# Altium PCB PCB1.PcbDoc
Units mm, origin at the board's own origin, x right, y up, seen from the top; angles counter-clockwise.
Board outline 26.42 x 76.71 mm, 2 copper layers (Top Layer, Bottom Layer), stack 1.671 mm thick; 31 components, 65 nets, 188 pads, 84 vias.
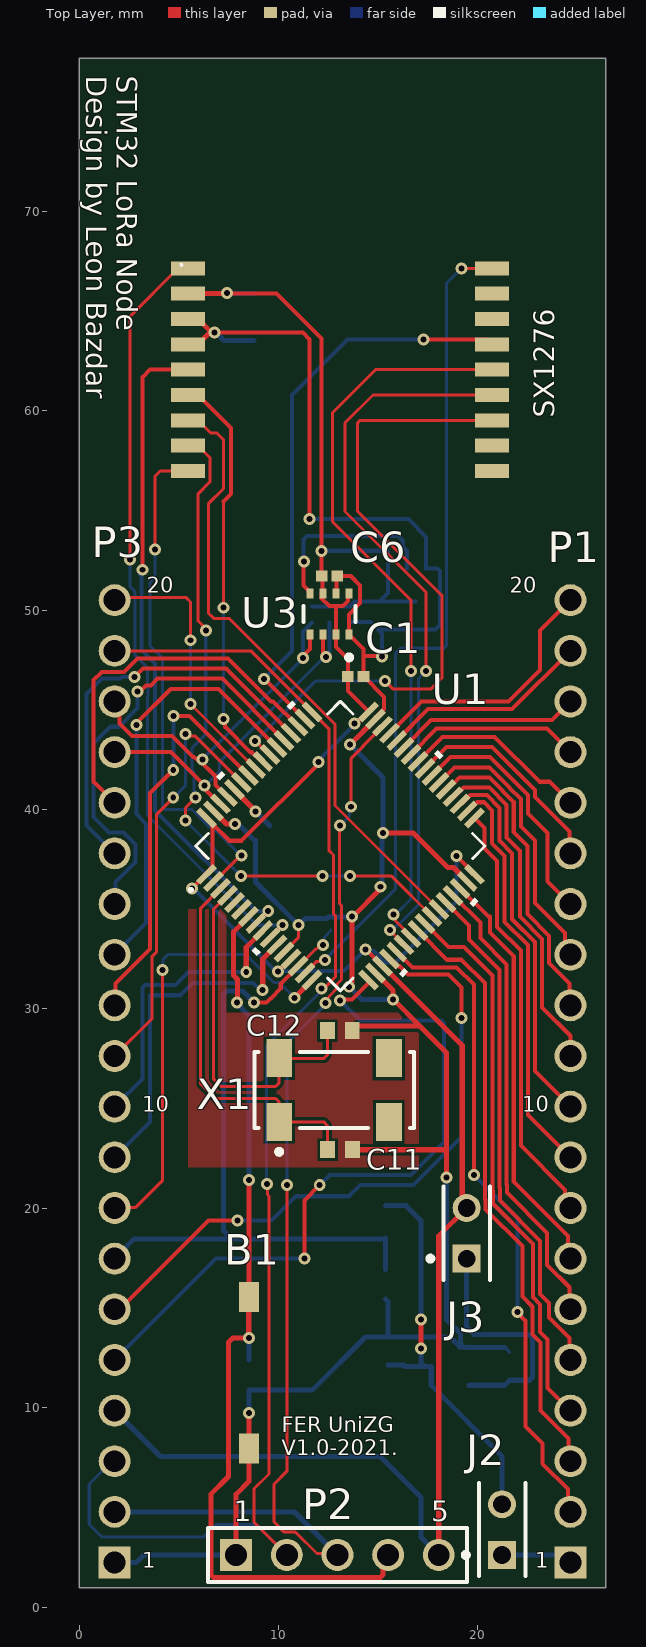
[diagram p0: Top Layer view]
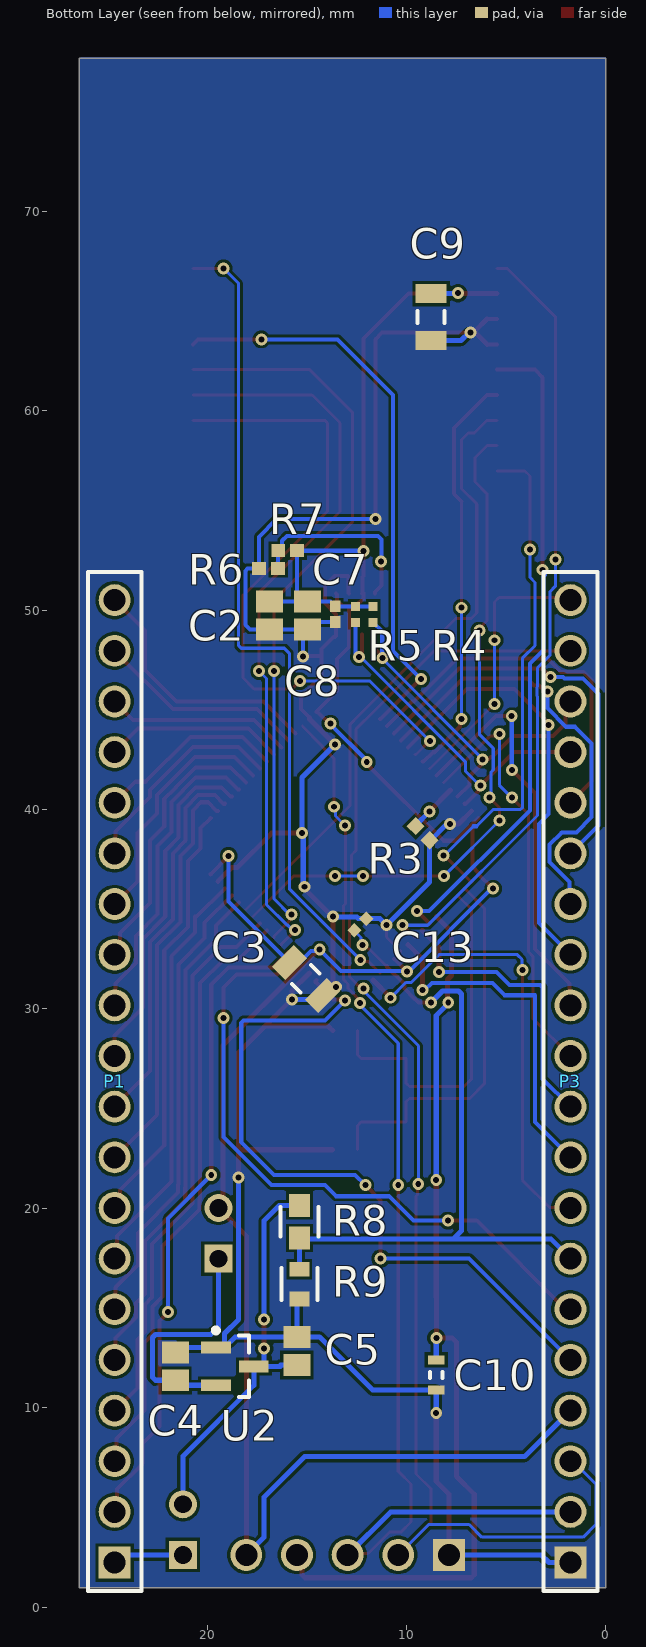
[diagram p1: Bottom Layer view, seen from below]

## Layer stack, top to bottom
Top Solder: solder mask 0.0102, Solder Resist, Dk 3.5
Top Layer: signal copper 0.0356
Dielectric 1: dielectric 1.6, FR-4, Dk 4.8
Bottom Layer: signal copper 0.0356
Bottom Solder: solder mask 0.0102, Solder Resist, Dk 3.5

## Board outline
0,77.673 26.416,77.673 26.416,0.965 0,0.965

## Design rules (kind name [scope] priority, off if disabled: settings)
Clearance [All] p1: gap=0.152 ignorepadtopadclearanceinfootprint=TRUE
PolygonConnect [All] p1: connectstyle=Direct reliefconductorwidth=0.254 reliefentries=4 polygonreliefangle="90 Angle" airgapwidth=0.254
RoutingPriority RoutingPriority_1 [All] p1: routingpriority=0
RoutingPriority [All] p2: routingpriority=0
RoutingVias [All] p1: holewidth=0.3 width=0.6 viastyle="Through Hole" minholewidth=0.3 minwidth=0.6 maxholewidth=0.3 maxwidth=0.6
SolderMaskExpansion [All] p1: expansion=0.102 istentingtop=FALSE
UnRoutedNet [All] p1: checkbadconnections=TRUE
Width [All] p1: maxlimit=1.016 minlimit=0.152 preferedwidth=0.305
28 further rules are at their usual default settings.

## Classes and differential pairs
net class PC[0..15]: PC0 PC1 PC2 PC3 PC4 PC5 PC6 PC7 PC8 PC9 PC10 PC11 PC12 PC13 PC14 PC15
net class PB[0..15]: PB0 PB1 PB2 PB3 PB4 PB5 PB6 PB7 PB8 PB9 PB10 PB11 PB12 PB13 PB14 PB15
net class PA[0..15]: PA0 PA1 PA2 PA3 PA4 PA5 PA6 PA7 PA8 PA9 PA10 PA11 PA12 PA13 PA14 PA15

## Components (designator, comment, footprint, x,y, rotation, side; value= is the part's Value field where it differs from the comment)
B1 "PushButton 3x6x2.5 SMD" "PushButton 3x6x2.5 SMD-Footprint-1" 8.509,11.75 r270 top
C1 "100nF" CAPC1005X56X25LL10T15 13.868,46.66 r0 top
C2 "1uF" CAPC2013X145X50LL20T25 16.878,49.733 r270 bottom
C3 "10uF" CAPC2013X145X20ML20 15.044,31.503 r45 bottom
C4 "1uF" CAPC2013X145X50LL20T25 21.59,12.076 r90 bottom
C5 "1uF" CAPC2013X145X50LL20T25 15.494,12.841 r90 bottom
C6 "100nF" CAPC1005X56X25LL10T15 12.552,51.703 r0 top
C7 "100nF" CAPC1005X56X25LL10T15 13.577,49.789 r270 bottom
C8 "1uF" CAPC2013X145X50LL20T25 14.974,49.733 r270 bottom
C9 "10uF" CAPC2013X145X20ML20 8.763,64.687 r90 bottom
C10 "100nF" CAPC1608X90X20LL10 8.509,11.645 r270 bottom
C11 "4.3pF" CAPC1608X90X35LL10T15 13.081,22.936 r0 top
C12 "4.3pF" CAPC1608X90X35LL10T15 13.071,28.905 r180 top
C13 "1nF" CAPC1005X55X25LL05T05 12.319,34.239 r315 bottom
J2 "BAT current" TECO-5-146280-2_V 21.209,3.886 r90 top
J3 "DEV CUR" TECO-5-146280-2_V 19.431,18.745 r90 top
P1 "20p header" 61302011121 24.638,26.365 r90 bottom
P2 "SWD header 2.54" 61300511121 12.954,2.616 r0 top
P3 "20p header" 61302011121 1.778,26.365 r90 bottom
R3 "100K" RESC1005X40X25ML05T05 9.195,38.811 r45 bottom
R4 "4.7k" RESC1005X40X25LL05T05 11.672,49.779 r90 bottom
R5 "4.7k" RESC1005X40X25LL05T05 12.561,49.779 r90 bottom
R6 "0R" RESC1005X40X25ML05T10 16.912,52.084 r180 bottom
R7 "0R" RESC1005X40X25ML05T10 15.957,52.973 r0 bottom
R8 "1.2MΩ" FP-CRCW0603-e3-IPC_A 15.367,19.327 r270 bottom
R9 "3.24MΩ" FP-CRCW0603-e3-MFG 15.367,16.193 r270 bottom
SX1276 "RC-SM1276-868" RC-SM1276-868 13.303,66.164 r0 top (schematic designator LoRa)
U1 "STM32L072RZT6" LQFP64-10x10mm 13.098,38.163 r45 top
U2 "MCP1700T-3302E/TT" SOT-23-TT3_N 18.608,12.075 r180 bottom
U3 "BME280" FP-BME280-MFG 12.561,49.798 r270 top
X1 "ABS25-32.768KHZ-6-T" ABRA-ABS25-4_V 12.783,25.933 r0 top

## Footprints (in the part's own frame and the unit in brackets; to place one, negate y for a bottom-side part, rotate by r counter-clockwise, add the part's x,y. Pads: shape width x height; smd on the part's side, far side on the other; paste and mask are expansions set on the pad)
61300511121 [mm] "Pin Header, pitch 2.54 mm, THT, Vertical, single row, 5p"
  rect 1.6x1.6 hole 1.1: 1(-5.08,0)
  round 1.6 hole 1.1: 2(-2.54,0) 3(0,0) 4(2.54,0) 5(5.08,0)
  silkscreen extent -6.5,-1.34 6.5,1.34, body extent -6.35,-1.27 6.35,1.27, height 8.57
61302011121 [mm] "Pin Header, pitch 2.54 mm, THT, Vertical, single row, 20p"
  rect 1.6x1.6 hole 1.1: 1(-24.13,0)
  round 1.6 hole 1.1: 2(-21.59,0) 3(-19.05,0) 4(-16.51,0) 5(-13.97,0) 6(-11.43,0) 7(-8.89,0) 8(-6.35,0) 9(-3.81,0) 10(-1.27,0) 11(1.27,0) 12(3.81,0) 13(6.35,0) 14(8.89,0) 15(11.43,0) 16(13.97,0) 17(16.51,0) 18(19.05,0) 19(21.59,0) 20(24.13,0)
  silkscreen extent -25.55,-1.35 25.55,1.35, body extent -25.4,-1.27 25.4,1.27, height 8.57
ABRA-ABS25-4_V [mm] "SMD, 4-Leads, Body 8x3.8mm, Pitch 5.5mm, Height 2.5mm"
  rect 1.3x1.9 smd: 1(-2.75,-1.6) 2(2.75,-1.6) 3(2.75,1.6) 4(-2.75,1.6)
  silkscreen extent -4,-3.22 4,1.9, body extent -4,-2 4,2, height 2.66
CAPC1005X55X25LL05T05 [mm] "Chip Capacitor, 2-Leads, Body 1.00x0.50mm, IPC High Density"
  rect 0.52x0.52 smd: 1(-0.41,0) 2(0.41,0)
  body extent -0.53,-0.28 0.53,0.28, height 0.55
CAPC1005X56X25LL10T15 [mm] "Chip Capacitor, 2-Leads, Body 1.00x0.50mm, IPC High Density"
  rect 0.58x0.54 smd: 1(-0.39,0) 2(0.39,0)
  body extent -0.55,-0.3 0.55,0.3, height 0.56
CAPC1608X90X20LL10 [mm] "Chip Capacitor, 2-Leads, Body 1.70x0.90mm, IPC High Density"
  rect 0.45x0.85 smd: 1(-0.75,0) 2(0.75,0)
  silkscreen extent -0.15,-0.33 0.15,0.33, body extent -0.85,-0.45 0.85,0.45, height 0.9
CAPC1608X90X35LL10T15 [mm] "Chip Capacitor, 2-Leads, Body 1.60x0.80mm, IPC High Density"
  rect 0.75x0.85 smd: 1(-0.625,0) 2(0.625,0)
  body extent -0.85,-0.45 0.85,0.45, height 0.9
CAPC2013X145X20ML20 [mm] "Chip Capacitor, 2-Leads, Body 2.20x1.45mm, IPC Low Density"
  rect 0.95x1.55 smd: 1(-1.175,0) 2(1.175,0)
  silkscreen extent -0.3,-0.67 0.3,0.67, body extent -1.1,-0.73 1.1,0.73, height 1.45
CAPC2013X145X50LL20T25 [mm] "Chip Capacitor, 2-Leads, Body 2.00x1.25mm, IPC High Density"
  rect 1.1x1.35 smd: 1(-0.7,0) 2(0.7,0)
  body extent -1.1,-0.72 1.1,0.72, height 1.45
FP-BME280-MFG [mm]
  rect 0.5x0.35 smd paste+0 mask+0: 1(1.025,0.975) 2(1.025,0.325) 3(1.025,-0.325) 4(1.025,-0.975) 5(-1.025,-0.975) 6(-1.025,-0.325) 7(-1.025,0.325) 8(-1.025,0.975)
  silkscreen extent -0.4,-1.3 2.3,1.3, body extent -1.8,-1.8 1.8,1.8, height 0.25
FP-CRCW0603-e3-IPC_A [mm]
  rect 1.135x1.062 smd paste+0 mask+0: 1(-0.815,0) 2(0.815,0)
  silkscreen extent -0.75,-0.95 0.75,0.95, body extent -0.77,-0.43 0.77,0.43, height 0.5
FP-CRCW0603-e3-MFG [mm]
  rect 0.75x1 smd paste+0 mask+0: 1(-0.75,0) 2(0.75,0)
  silkscreen extent -0.8,-0.9 0.8,0.9, body extent -0.77,-0.43 0.77,0.43, height 0.5
LQFP64-10x10mm [mil]
  rect 47x12 smd paste+0 mask+0: 1(-226.38,147.64) 2(-226.38,127.95) 3(-226.38,108.27) 4(-226.38,88.58) 5(-226.38,68.9) 6(-226.38,49.21) 7(-226.38,29.53) 8(-226.38,9.84) 9(-226.38,-9.84) 10(-226.38,-29.53) 11(-226.38,-49.21) 12(-226.38,-68.9) 13(-226.38,-88.58) 14(-226.38,-108.27) 15(-226.38,-127.95) 16(-226.38,-147.64) 33(226.38,-147.64) 34(226.38,-127.95) 35(226.38,-108.27) 36(226.38,-88.58) 37(226.38,-68.9) 38(226.38,-49.21) 39(226.38,-29.53) 40(226.38,-9.84) 41(226.38,9.84) 42(226.38,29.53) 43(226.38,49.21) 44(226.38,68.9) 45(226.38,88.58) 46(226.38,108.27) 47(226.38,127.95) 48(226.38,147.64)
  rect 12x47 smd paste+0 mask+0: 17(-147.64,-226.38) 18(-127.95,-226.38) 19(-108.27,-226.38) 20(-88.58,-226.38) 21(-68.9,-226.38) 22(-49.21,-226.38) 23(-29.53,-226.38) 24(-9.84,-226.38) 25(9.84,-226.38) 26(29.53,-226.38) 27(49.21,-226.38) 28(68.9,-226.38) 29(88.58,-226.38) 30(108.27,-226.38) 31(127.95,-226.38) 32(147.64,-226.38) 49(147.64,226.38) 50(127.95,226.38) 51(108.27,226.38) 52(88.58,226.38) 53(68.9,226.38) 54(49.21,226.38) 55(29.53,226.38) 56(9.84,226.38) 57(-9.84,226.38) 58(-29.53,226.38) 59(-49.21,226.38) 60(-68.9,226.38) 61(-88.58,226.38) 62(-108.27,226.38) 63(-127.95,226.38) 64(-147.64,226.38)
  silkscreen extent -273,-270 270,270, body extent 0,0 10,10, height 10
"PushButton 3x6x2.5 SMD-Footprint-1" [mm]
  rect 1.5x1 smd: 1(-3.8,0) 2(3.8,0)
  body extent -3.8,-1.5 3.9,1.5, height 2.5
RC-SM1276-868 [mm] "Chip Array, Flat, 18-Leads, Pitch 1,27mm,  Body 23,00x16,00mm,  IPC Medium Density"
  rect 1.7x0.7 smd: 1(-7.842,0.968) 2(-7.842,-0.302) 3(-7.842,-1.572) 4(-7.842,-2.842) 5(-7.842,-4.112) 6(-7.842,-5.382) 7(-7.842,-6.652) 8(-7.842,-7.922) 9(-7.842,-9.192) 10(7.398,-9.192) 11(7.398,-7.922) 12(7.398,-6.652) 13(7.398,-5.382) 14(7.398,-4.112) 15(7.398,-2.842) 16(7.398,-1.572) 17(7.398,-0.302) 18(7.398,0.968)
  silkscreen extent -8.23,1.1 -8.13,1.2, body extent -8,-11.5 8,11.5, height 1
RESC1005X40X25LL05T05 [mm] "Chip Resistor, 2-Leads, Body 1.05x0.55mm, IPC High Density"
  rect 0.45x0.45 smd: 1(-0.4,0) 2(0.4,0)
  body extent -0.53,-0.28 0.53,0.28, height 0.4
RESC1005X40X25ML05T05 [mm] "Chip Resistor, 2-Leads, Body 1.05x0.55mm, IPC Low Density"
  rect 0.65x0.65 smd: 1(-0.5,0) 2(0.5,0)
  body extent -0.52,-0.27 0.52,0.28, height 0.4
RESC1005X40X25ML05T10 [mm] "Chip Resistor, 2-Leads, Body 1.00x0.50mm, IPC Low Density"
  rect 0.7x0.65 smd: 1(-0.475,0) 2(0.475,0)
  body extent -0.53,-0.27 0.53,0.28, height 0.4
SOT-23-TT3_N [mm] "SOT23, 3-Leads, Body 2.9x1.3mm, Pitch 0.95mm, Lead Span 2.4mm, IPC Medium Density"
  rect 1.5x0.6 smd: 1(-0.95,0.95) 2(-0.95,-0.95) 3(0.95,0)
  silkscreen extent -1.07,-1.55 0.7,1.92, body extent -0.7,-1.52 0.7,1.53, height 1.12
TECO-5-146280-2_V [mm] "Connector, 2-Leads, Body 4.67x2.34mm, Pitch 2.54mm"
  rect 1.4x1.4 hole 0.89: 1(-1.27,0)
  round 1.4 hole 0.89: 2(1.27,0)
  silkscreen extent -2.34,-1.17 2.34,1.94, body extent -2.34,-1.17 2.34,1.17, height 5.33

## Part data
B1: library part CMP-011-00013-4
C1 C6 C7: library part CMP-2008-02842-1, Manufacturer="AVX Interconnect / Elco", Part Number=0402YD104KAT2A
C2 C4 C5 C8: library part CMP-2007-01016-1, Manufacturer=Kemet, Part Number=C0805C105K4PACTU
C3 C9: library part CMP-2000-05452-1, "Multilayer Ceramic Chip Capacitor, 10 uF, +/- 10%, 10 V, -55 to 125 degC, 0805 (2012 Metric), RoHS, Tape and Reel", Capacitance=10µF, Manufacturer=TDK, Operating Temperature=-55degC~125degC, Package / Case=0805(2012Metric), Package Description="2-Pin Surface Mount Device, Body 2 x 1.25 mm", Package Reference=805, PCN Part Number=MLCCPartNumberChange30/Nov/2012, Ratings=-, Standard Package=1, Temperature Coefficient=X7R, Tolerance=±10%, Voltage - Rated=10V, Applications=GeneralPurpose, Category=Capacitors, Datasheet URL=http://download.siliconexpert.com/pdfs/2015/4/21/15/54/45/779/tdk_/manual/37024850441143360mlcc_commercial_general_en.pdf, Datasheet Version=Mar-15, Family=CeramicCapacitors, Features=-, Height - Seated (Max)=-, Lead Spacing=-, Lead Style=-, Manufacturer URL=http://www.tdk.com/, Mounting Type=SurfaceMount,MLCC, Online Catalog=CSeries,GeneralPurpose, Other Names=445-6857-6, Packaging=Digi-Reel, Product Training Modules=CSeriesGeneralApplicationsSEAT,CCV,andTVCLDesignToolsGuidetoReplacinganElectrolyticCapacitorwithanMLCC, RoHS Information=RoHSCertificate-MLCC, Series=C, Size / Dimension="0.079\"Lx0.049\"W(2.00mmx1.25mm)", Thickness (Max)="0.057\"(1.45mm)"
C10: library part CMP-2000-07546-1, "Chip Capacitor, 0.1 uF, +/- 10%, 50 V, -55 to 125 degC, 0603 (1608 Metric), RoHS, Tape and Reel", Case Code (Imperial)=0603, Case Code (Metric)=1608, Dielectric=X7R, Manufacturer=TDK, Max Operating Temperature=125degC, Min Operating Temperature=-55degC, Package Description="2-Pin Surface Mount Device, Body 1.6 x 0.8 mm", Package Quantity=1, Package Reference=603, Tolerance=10%, Voltage=50V, Capacitance=100nF, Case/Package=0603, Composition=Ceramic, Datasheet URL=https://product.tdk.com/info/en/catalog/datasheets/mlcc_automotive_general_en.pdf, Datasheet Version=12/2014, Depth=0.8mm, Height=0.8mm, Lead Free=LeadFree, Length=1.6mm, Manufacturer URL=http://www.tdk.com/, Mount=SurfaceMount, Mounting Technology=SurfaceMount, Packaging=TapeandReel, Radiation Hardening=No, REACH SVHC=NoSVHC, RoHSCompliant=True, Termination=SMD/SMT, Thickness=0.035inch, Voltage Rating=50V, Voltage Rating (DC)=50V, Weight=7.1E-05oz, Width=0.8mm
C11 C12: library part CMP-2006-02448-1, Manufacturer=Murata, Part Number=GQM1885C2A4R3BB01D
C13: library part CMP-2008-01229-1, Manufacturer=Vitramon, Part Number=VJ0402Y102KXXCW1BC
J2 J3: library part CMP-2000-07492-1, "Male Header, Pitch 2.54 mm, 1 x 2 Position, Height 8.21 mm, Tail Length 3.05 mm, -65 to 105 degC, RoHS, Bulk", Case\/Package=100, Colour=Black, Current Rating=3A, Flammability Rating=UL94V-0, High Temperature Housing=Yes, Manufacturer="TE Connectivity", Max Current Rating=5A, Max Operating Temperature=105degC, Min Operating Temperature=-65degC, Package Description="Male Header, Pitch 2.54 mm, 1 x 2 Position, Height 8.21 mm, Tail Length 3.05 mm", Package Quantity=500, Package Reference=5-146280-2, Approvals=CSA, Board Standoff=No(Without), Connector Type=Header, Contact Gender=Male, Contact Material=CopperAlloy, Contact Mating Length=0.23inch, Contact Plating=Matte, Contact Protection=No(Without), Contact Shape=Square, Datasheet URL=http://www.te.com/commerce/DocumentDelivery/DDEController?Action=showdoc&DocId=Customer+Drawing%7F146280%7FH1%7Fpdf%7FEnglish%7FENG_CD_146280_H1.pdf%7F5-146280-2, Datasheet Version="Rev. H1, 08/2016", Depth=2.34mm, Gasket=No(Without), High Speed Serial Data Connector=No, Housing Colour=Black, Housing Material=Polymer, Keyed=No, Length=4.67mm, Manufacturer URL=http://www.te.com/, Mating Alignment=No(Without), Mating Connector Lock=No(Without), Mating Post Length=0.23inch, Mount=ThroughHole, Mounting Technology=ThroughHole, Number of Contacts=2, Number of Positions=2, Number of Rows=1, Orientation=Straight, Packaging=Carton, Panel Mount Retention=No(Without), PCB Mount Retention=Without, PCB Mounting Orientation=Vertical, PCB Thickness=0.063inch, Pitch=2.54mm, Radiation Hardening=No, RoHSCompliant=true, Row Spacing=2.54mm, Selectively Loaded=No(Without), Stabilizers=No(Without), Termination=ThroughHole, Termination Post Length=0.12inch
P1 P3: library part CMP-1502-01102-1, "THT Vertical Pin Header WR-PHD, Pitch 2.54 mm, Single Row, 20 pins", Contact Resistance=20mOhm, Manufacturer="Wurth Elektronik", Operating Temperature=-40to105degC, Package Reference=61302011121, Rated Current=3A, Withstanding Voltage=500VAC, Working Voltage=250VAC, Datasheet URL=https://katalog.we-online.de/em/datasheet/6130xx11121.pdf, Gender=Male, Manufacturer URL=http://www.we-online.de, Mounting Technology=THT, Orientation=Vertical, Packaging=Bag, Part Number=61302011121, Pin Number=20, Pitch=2.54mm, Publisher=WurthElektronik, Row Number=Single
P2: library part CMP-1502-01068-1, "THT Vertical Pin Header WR-PHD, Pitch 2.54 mm, Single Row, 5 pins", Contact Resistance=20mOhm, Manufacturer="Wurth Elektronik", Operating Temperature=-40to105degC, Package Reference=61300511121, Rated Current=3A, Withstanding Voltage=500VAC, Working Voltage=250VAC, Datasheet URL=https://katalog.we-online.de/em/datasheet/6130xx11121.pdf, Gender=Male, Manufacturer URL=http://www.we-online.de, Mounting Technology=THT, Orientation=Vertical, Packaging=Bag, Part Number=61300511121, Pin Number=5, Pitch=2.54mm, Publisher=WurthElektronik, Row Number=Single
R3: library part CMP-2002-08123-2, "Chip Resistor, 100 KOhm, +/- 1%, 0.63 W, -55 to 155 degC, 0402 (1005 Metric), RoHS, Tape and Reel", Case Code (Imperial)=0402, Case Code (Metric)=1005, Max Operating Temperature="155 degC", Min Operating Temperature="-55 degC", Package Quantity=10000, Power Rating="63 mW", Resistance="100 kohm", Tolerance=1%, Type (Resistor)="Thick Film", Voltage Rating="50 V", Case\Package=0402, ComponentLink1Description="Manufacturer URL", ComponentLink1URL=http://www.vishay.com/, ComponentLink2Description=Datasheet, ComponentLink2URL=http://www.vishay.com/docs/20035/dcrcwe3.pdf, DatasheetVersion=06/2012, Height="0.35 mm", Length="1 mm", Mount="Surface Mount", Mounting Technology="Surface Mount", PackageDescription="2-Pin Surface Mount Device, Body 1 x 0.5 mm", PackageReference=0402, Packaging="Tape and Reel", Pins=2, Radiation Hardening=No, REACH SVHC=Unknown, RoHSCompliant=true, Weight="2.3E-05 oz", Width="0.5 mm"
R4 R5: library part CMP-1665-00031-3, "Chip Resistor, 4.7 KOhm, +/- 1%, 0.1 W, -55 to 155 degC, 0402 (1005 Metric), RoHS, Tape and Reel", Case Code (Imperial)=0402, Case Code (Metric)=1005, Max Operating Temperature="155 degC", Min Operating Temperature="-55 degC", Package Quantity=1, PartNumber=ERJ-2RKF4701X, Power Rating="100 mW", Resistance="4.7 KOhm", Tolerance=1%, Voltage Rating="50 V", Case\/Package=0402, ComponentLink1Description="Manufacturer URL", ComponentLink1URL=http://www.panasonic.com/, ComponentLink2Description=Datasheet, ComponentLink2URL=http://industrial.panasonic.com/cdbs/www-data/pdf/RDA0000/AOA0000C86.pdf, DatasheetVersion=04/2015, Height="0.35 mm", Length="1 mm", Mount="Surface Mount", Mounting Technology="Surface Mount", PackageDescription="2-Pin Surface Mount Device, Body 1 x 0.5 mm", PackageReference=0402, Packaging="Cut Tape", Pins=2, Radiation Hardening=No, REACH SVHC=Yes, RoHSCompliant=true, Width="0.5 mm"
R6 R7: library part CMP-2002-08060-1, Manufacturer="Yageo / Phycomp", Part Number=RC0402JR-130RL
R8: library part CMP-2000-03023-2, "RES Thick Film, 1.2MΩ, 1%, 0.1W, 100ppm/°C, 0603", Case Code (Imperial)=0603, Case Code (Metric)=1608, Max Operating Temperature=155°C, Max Power Dissipation=100mW, Min Operating Temperature=-55°C, Package Quantity=10, Resistance=1.2MR, Temperature Coefficient=100ppm/°C, Tolerance=1%, Voltage Rating=75V, Case/Package=0603, Composition="Thick Film", Contact Plating=Tin, Depth=0.85mm, Features="Automotive AEC-Q200", Height=0.45mm, Lead Free="Lead Free", Length=1.55mm, Military Standard=Not, Number of Pins=2, Number of Terminations=2, Packaging="Tape and Reel", Power Rating=100mW, Radiation Hardening=No, Termination=SMD/SMT, Voltage Rating (DC)=75V, Weight=7.1E-05oz, Width=0.033inch
R9: library part CMP-2000-03317-2, "RES Thick Film, 3.24MΩ, 1%, 0.1W, 100ppm/°C, 0603", Case Code (Imperial)=0603, Case Code (Metric)=1608, Max Operating Temperature=155°C, Max Power Dissipation=100mW, Min Operating Temperature=-55°C, Package Quantity=10, Resistance=3.24MR, Temperature Coefficient=100ppm/°C, Tolerance=1%, Voltage Rating=75V, Case/Package=0603, Composition="Thick Film", Contact Plating=Tin, Depth=0.85mm, Features="Automotive AEC-Q200", Height=0.02inch, Lead Free="Lead Free", Length=1.55mm, Military Standard=Not, Number of Terminations=2, Packaging="Tape and Reel", Power Rating=100mW, Radiation Hardening=No, Voltage Rating (DC)=75V, Weight=7.1E-05oz, Width=0.033inch
SX1276: library part CMP-021-00007-1, "https://www.radiocontrolli.com/it/componente/97/rc-sm1276-868", Max Operating Temperature=85°C, Max Supply Voltage=3.7V, Min Operating Temperature=-40°C, Min Supply Voltage=1.8V, Mounting Technology=SMT, Pins=18
U1: "No Description Available", Built_By=EMA_UL_Team, Copyright="Copyright (C) 2018 Accelerated Designs. All rights reserved", Manufacturer_Part_Number=STM32L072RZT6, RefDes=RefDes, SourceLibrary=Updates_to_database_2020-10-19, Type=DEV, Vendor=STMicroelectronics
U2: library part CMP-0136-00791-1, "Low Quiescent Current LDO, 3-Pin SOT-23, Extended Temperature, Tape and Reel", Code_IPC=SOT23-3, DatasheetVersion="revB, Feb-2007", PackageDescription="3-Lead Plastic Small Outline Transistor (TT) [SOT-23]", PackageReference=SOT-23-TT3, PackageVersion="revBB, Aug-2009"
U3: library part CMP-191074-000001-1, "SENSOR PRESSURE HUMIDITY TEMP", Case/Package=LGA, Max Operating Temperature=85°C, Min Operating Temperature=-40°C, Accuracy=3%, Lead Free="Lead Free", Mount="Surface Mount", Number of Pins=8, Output Type=SPI, Packaging="Cut Tape", Response Time=1s, Sensor Type=Temperature
X1: library part CMP-2000-05036-1, "Low Frequency Crystal, 32.768 KHz, 6 pF, +/- 20 ppm, -40 to 85 degC, 4-Pin SMD, RoHS, Tape and Reel", Case Height=2.5mm, Case Length=8mm, Case Width=3.8mm, Frequency=32.768kHz, Load Capacitance=6pF, Manufacturer=Abracon, Operating Temperature Range=-40Cto+85C, Package / Case=8mmx3.8mm, Package Description="4-Pin Surface Mount Device, Body 8 x 3.8 mm, Pitch 5.5 mm", Package Reference=ABS25, Tolerance=20PPM, Brand=ABRACON, Datasheet URL=https://datasheet.ciiva.com/854/abs25-854528.pdf, Datasheet Version=Jun-17, Dimensions=3.8mmWx8mmLx2.5mmH, ESR=50kOhms, Factory Pack Quantity=3000, Manufacturer URL=http://www.abracon.com/, Mounting Style=SMD/SMT, Packaging=Reel, Product Category=Crystals, RoHS=Details, Series=ABS25, Termination Style=SMD/SMT, Type=LowFrequencyCrystal

## Via types
v1: diameter 0.6, hole 0.3, Top Layer to Bottom Layer, 84 vias

## Nets (pads, with @x,y where several pads share a name; then routed paths per layer and width w, separated by ;. In a path a pad name is that pad's centre, name@x,y a point inside that pad or via, vN(x,y) a via of type N, cw(c..) or ccw(c..) an arc to the next point about the centre after c; other vN are vias at no path point)
3V3_REG: C4.1 J3.1 U2.2 | length 12.3
  Bottom Layer w0.254: J3.1 19.431,14.046 19.812,13.665 22.584,13.665 22.733,13.516 22.733,11.525 22.584,11.376 C4.1 21.339,11.125 U2.2
BOOT0: R3.2 U1.60 | length 2.6
  Top Layer w0.152: U1.60@7.795,40.969 U1.60
  Top Layer w0.254: U1.60@7.795,40.969 8.839,39.925 v1(8.839,39.903)
  Bottom Layer w0.254: v1(8.839,39.903) 9.548,39.194 R3.2
NetC5_1: C5.1 J2.2 R8.1 U2.3 | length 20
  Top Layer w0.254: v1(17.145,12.962) v1(17.145,14.427)
  Bottom Layer w0.254: R8.1 16.383,20.142 17.145,19.38 v1(17.145,14.427) ; C5.1 16.324,12.141 ; 16.324,12.075 U2.3@17.318,12.075 ; v1(17.145,12.962) 17.145,12.248 U2.3@17.318,12.075 ; J2.2 21.209,7.569 17.658,11.12 U2.3 U2.3@17.318,12.075
NetLoRa_10: SX1276.10
NetLoRa_11: SX1276.11
NetLoRa_16: SX1276.16
NetLoRa_17: SX1276.17
NetU1_5: U1.5
NetU1_6: U1.6
NetX1_2: X1.2
NetX1_3: X1.3
NRST: B1.1 C10.1 P2.4 U1.7 | length 45.9
  Top Layer w0.254: v1(7.907,30.312) 7.944,30.349 7.944,31.472 7.747,31.67 7.747,33.872 U1.7 ; v1(8.509,21.412) B1.1 8.507,15.548 v1(8.507,13.5) 7.709,13.5 7.493,13.284 7.493,6.553 6.604,5.664 6.604,1.622 6.753,1.473 15.091,1.473 15.24,1.622 15.24,2.362 P2.4
  Bottom Layer w0.254: v1(7.907,30.312) 7.907,30.269 8.509,29.668 v1(8.509,21.412) ; v1(8.507,13.5) 8.509,13.497 C10.1
PA0: C13.2 P3.7 R8.2 R9.1 U1.14 | length 35.6
  Top Layer w0.152: U1.14 11.023,32.152 11.871,33 11.904,33 12.111,33.207 v1(12.218,33.207)
  Top Layer w0.203: v1(8.768,30.321) 9.387,30.321 9.596,30.53 9.626,30.53 10.109,31.013 10.109,31.238 10.977,32.106 U1.14
  Bottom Layer w0.152: v1(12.218,33.207) 12.286,33.275 12.286,33.581 12.609,33.903 C13.2
  Bottom Layer w0.254: P3.7 2.768,18.466 7.646,18.466 ; v1(8.768,30.321) 8.198,30.891 7.388,30.891 7.239,30.743 7.239,18.872 7.646,18.466 ; R9.1 R8.2 15.321,18.466 7.646,18.466
PA1: SX1276.18 U1.15 | length 41.6
  Top Layer w0.152: U1.15 11.914,32.383 12.24,32.383 v1(12.319,32.461) ; v1(19.177,67.132) SX1276.18
  Bottom Layer w0.152: v1(12.319,32.461) 15.875,36.017 15.875,47.828 16.129,48.082 18.288,48.082 18.415,48.209 18.415,66.37 v1(19.177,67.132)
PA2: P3.8 U1.16 | length 22.9
  Top Layer w0.152: P3.8 1.791,20.028 2.807,20.028 4.191,21.412 v1(4.191,31.953)
  Top Layer w0.254: v1(10.795,30.556) U1.16
  Bottom Layer w0.152: v1(4.191,31.953) 4.212,31.974 4.212,32.482 4.445,32.715 8.366,32.715 9.763,31.318 10.033,31.318 v1(10.795,30.556)
PA3: P3.5 U1.17 | length 36.4
  Top Layer w0.203: v1(11.303,17.475) 11.303,20.396 v1(12.065,21.158) ; v1(13.081,30.429) 13.121,30.469 13.686,30.469 14.551,31.335 14.551,31.407 U1.17
  Bottom Layer w0.203: P3.5 6.858,17.475 v1(11.303,17.475) ; v1(12.065,21.158) 12.573,21.666 16.637,21.666 18.288,23.317 18.288,29.294 18.169,29.413 14.097,29.413 v1(13.081,30.429)
PA4: P3.6 U1.20 | length 32.7
  Top Layer w0.203: P3.6 2.032,14.935 6.477,19.38 v1(7.93,19.38) ; U1.20 15.645,32.506 16.013,32.138 16.074,32.138 16.487,31.725 18.517,31.725 19.177,31.064 v1(19.177,29.54)
  Bottom Layer w0.203: v1(7.93,19.38) 9.652,19.38 10.876,20.604 13.543,20.604 14.097,21.158 16.764,21.158 19.177,23.571 v1(19.177,29.54)
PA5: P1.2 U1.21 | length 33
  Top Layer w0.203: U1.21 16.706,32.08 18.923,32.08 19.791,31.212 v1(19.791,21.666) ; v1(21.971,14.808) 21.971,14.766 22.377,14.359 22.377,9.068 23.241,8.204 23.241,7.188 24.511,5.918 24.511,4.902 P1.2
  Bottom Layer w0.203: v1(19.791,21.666) 21.971,19.487 v1(21.971,14.808)
PA6: SX1276.13 U1.22 | length 36.9
  Top Layer w0.152: v1(15.586,33.95) 15.586,33.929 16.28,33.235 U1.22 ; v1(17.389,46.939) 17.389,50.886 13.335,54.94 13.335,59.385 14.732,60.782 SX1276.13
  Bottom Layer w0.152: v1(15.586,33.95) 15.707,33.95 15.951,34.194 15.988,34.194 17.018,35.225 17.018,46.563 17.389,46.934 v1(17.389,46.939)
PA7: SX1276.14 U1.23 | length 37.6
  Top Layer w0.152: v1(15.769,34.723) 15.854,34.637 15.854,34.43 16.634,33.65 U1.23 ; v1(16.637,46.939) 16.637,50.495 12.7,54.432 12.7,59.893 14.859,62.052 SX1276.14
  Bottom Layer w0.152: v1(15.769,34.723) 15.851,34.723 16.637,35.509 v1(16.637,46.939)
PA8: P1.16 U1.41 | length 9.5
  Top Layer w0.203: U1.41 18.219,43.637 20.828,43.637 23.076,41.389 23.584,41.389 P1.16
PA9: P1.17 U1.42 | length 9
  Top Layer w0.203: U1.42 17.928,44.054 23.459,44.054 P1.17
PA10: P1.18 U1.43 | length 9.3
  Top Layer w0.203: U1.43 17.652,44.484 23.707,44.484 P1.18
PA11: P1.19 U1.44 | length 10.6
  Top Layer w0.203: U1.44 17.495,45.034 21.717,45.034 P1.19
PA12: P1.20 U1.45 | length 13
  Top Layer w0.203: U1.45 17.169,45.415 21.528,45.415 23.114,47.002 23.114,48.971 P1.20
PA13: P2.3 P3.2 U1.46 | length 58.2
  Top Layer w0.152: v1(10.414,21.158) 10.414,6.807 9.779,6.172 9.779,4.267 10.287,3.759 10.853,3.759 11.925,2.687 12.883,2.687 P2.3 ; v1(12.343,30.285) 12.343,30.406 12.552,30.616 12.552,30.648 12.931,31.027 12.931,31.245 13.152,31.467 13.152,35.18 13.061,35.272 13.061,39.172 v1(13.081,39.192) ; v1(13.642,40.134) 13.642,42.562 14.247,43.166 14.247,43.2 U1.46
  Bottom Layer w0.152: v1(10.414,21.158) 10.414,28.27 12.343,30.199 v1(12.343,30.285) ; v1(13.081,39.192) 13.556,39.668 13.556,40.049 v1(13.642,40.134)
  Bottom Layer w0.254: P3.2 10.795,4.775 P2.3
PA14: P2.2 P3.3 P3.19 U1.49 | length 71.3
  Top Layer w0.152: P3.19 8.609,47.955 U1.49 12.522,44.042 12.522,37.949 12.756,37.715 12.756,34.76 12.848,34.669 12.848,31.593 12.269,31.014 v1(12.156,31.014) ; v1(9.412,21.212) 9.449,21.175 9.449,20.684 9.525,20.607 9.525,6.68 8.763,5.918 8.763,4.267 P2.2
  Bottom Layer w0.152: P3.3 1.651,7.315 0.508,6.172 0.508,4.14 1.143,3.505 6.223,3.505 6.858,4.14 8.89,4.14 P2.2 ; v1(9.412,21.212) 9.398,21.226 9.398,28.143 12.156,30.901 v1(12.156,31.014)
PA15: SX1276.15 U1.50 | length 29
  Top Layer w0.203: v1(9.274,46.543) 9.294,46.543 11.31,44.527 U1.50 ; v1(17.278,63.571) 20.453,63.571 SX1276.15
  Bottom Layer w0.203: v1(9.274,46.543) 10.668,47.936 10.668,60.782 13.456,63.571 v1(17.278,63.571)
PB0: SX1276.8 U1.26 | length 35.1
  Top Layer w0.152: v1(5.334,39.446) 5.334,40.081 v1(5.842,40.589) ; SX1276.8 5.961,58.242 6.565,57.638 6.565,56.425 5.969,55.829 5.969,49.446 v1@6.35,49.065 ; v1(8.128,36.652) v1(12.192,36.652) ; v1(13.59,36.652) 15.67,36.652 U1.26
  Top Layer w0.203: v1(6.35,48.971) v1@6.35,49.065
  Bottom Layer w0.152: v1(5.334,39.446) v1@8.001,36.779 ; v1(5.842,40.589) 5.763,40.669 5.763,41.87 5.65,41.983 5.65,43.064 6.35,43.764 v1(6.35,48.971) ; v1(12.192,36.652) v1(13.59,36.652)
  Bottom Layer w0.203: v1@8.001,36.779 8.255,36.779 v1(8.128,36.652)
PB1: SX1276.7 U1.27 | length 31.3
  Top Layer w0.152: SX1276.7 5.961,59.512 6.585,58.888 6.888,58.888 7.239,58.537 7.239,56.083 6.477,55.321 6.477,49.852 6.744,49.586 7.514,49.586 11.461,45.639 11.464,45.639 12.442,44.661 12.442,44.657 12.827,44.272 12.827,40.202 U1.27
PB2: P1.5 U1.28 | length 25.5
  Top Layer w0.203: U1.28 19.558,34.178 19.558,33.477 21.082,31.953 21.082,21.041 21.096,21.027 21.096,20.382 23.114,18.364 23.114,15.697 23.562,15.249 23.562,14.52 24.583,13.5 24.583,12.451 P1.5
PB3: SX1276.12 U1.55 | length 33.4
  Top Layer w0.152: v1(8.824,43.421) 8.863,43.421 9.524,42.759 U1.55 ; v1(15.346,46.431) 15.727,46.05 17.653,46.05 18.199,46.596 18.199,50.749 18.161,50.749 13.97,54.94 13.97,59.385 14.097,59.512 SX1276.12
  Bottom Layer w0.152: v1(8.824,43.421) 11.835,46.431 v1(15.346,46.431)
PB4: SX1276.6 U1.56 | length 20.6
  Top Layer w0.152: v1(7.239,50.114) 7.239,55.448
  Top Layer w0.203: SX1276.6 5.961,60.782 7.62,59.123 7.62,55.829 7.239,55.448 ; v1(7.239,44.526) 7.315,44.45 7.315,44.147 8.595,42.867 8.676,42.867 9.137,42.405 U1.56
  Bottom Layer w0.152: v1(7.239,44.526) v1(7.239,50.114)
PB5: P3.20 U1.57 | length 13.7
  Top Layer w0.152: P3.20 1.905,50.622 5.372,50.622 5.588,50.406 v1(5.588,48.484) ; v1(5.588,45.288) 8.824,42.052 U1.57
  Bottom Layer w0.152: v1(5.588,45.288) v1(5.588,48.484)
PB6: P3.12 U1.58 | length 20.7
  Top Layer w0.203: P3.12 1.833,30.231 1.833,31.28 3.556,33.003 3.556,40.817 v1(4.72,41.981) ; v1(4.723,44.678) 5.523,44.678 U1.58
  Bottom Layer w0.203: v1(4.72,41.981) 4.721,41.983 4.721,44.676 v1(4.723,44.678)
PB7: P3.11 U1.59 | length 21.4
  Top Layer w0.152: P3.11@1.767,27.625 3.662,29.52 3.662,32.642 3.886,32.866 3.886,39.756 v1(4.72,40.589) ; v1(5.345,43.775) 5.43,43.689 5.804,43.689 U1.59
  Bottom Layer w0.152: v1(4.72,40.589) 5.345,41.214 v1(5.345,43.775)
PB8: P3.18 R4.1 U1.61 U3.4 | length 19
  Top Layer w0.203: P3.18 2.019,45.174 2.019,44.31 2.645,43.684 4.652,43.684 5.704,42.632 5.77,42.632 5.908,42.494 6.015,42.494 v1@6.097,42.413 ; v1(6.178,42.494) v1@6.097,42.413 ; U1.61 7.441,40.639 6.845,41.235 6.845,41.664 v1@6.097,42.413 ; v1(11.215,47.588) 11.215,47.682 11.586,48.053 U3.4
  Bottom Layer w0.152: v1(6.178,42.494) 6.178,42.523 11.158,47.503 v1@11.158,47.588
  Bottom Layer w0.203: v1@11.158,47.588 v1(11.215,47.588) 11.215,48.922 R4.1
PB9: P3.17 R5.1 U1.62 U3.3 | length 18.3
  Top Layer w0.203: P3.17 4.609,42.875 v1(6.291,41.193) 6.249,41.15 6.249,41.086 7.05,40.284 U1.62 ; v1@12.236,47.88 U3.3
  Bottom Layer w0.152: v1@6.319,41.193 7.048,41.922 7.048,42.392 12.295,47.639 v1(12.384,47.639)
  Bottom Layer w0.203: v1(6.291,41.193) v1@6.319,41.193 ; v1(12.384,47.639) 12.561,47.817 R5.1
PB10: P1.6 U1.29 | length 23.2
  Top Layer w0.203: U1.29 18.758,35.688 20.124,34.322 20.124,33.547 21.438,32.233 21.438,21.189 21.452,21.175 21.452,20.788 23.47,18.771 23.47,17.153 24.583,16.04 24.583,14.991 P1.6
PB11: P1.7 U1.30 | length 20.9
  Top Layer w0.203: U1.30 20.53,34.62 20.602,34.62 20.602,33.831 21.793,32.639 21.793,21.336 24.511,18.618 24.511,17.602 P1.7
PB12: P1.8 U1.33 | length 21.6
  Top Layer w0.203: U1.33 20.32,39.073 20.32,38.049 20.957,37.412 20.957,34.11 22.149,32.918 22.149,23.139 24.371,20.917 24.371,20.282 P1.8
PB13: P1.9 U1.34 | length 20.6
  Top Layer w0.203: U1.34 19.534,39.931 19.964,40.361 20.294,40.361 20.701,39.954 20.701,38.303 21.336,37.668 21.336,34.366 22.504,33.198 22.504,24.689 P1.9
PB14: P1.10 U1.35 | length 18.9
  Top Layer w0.203: U1.35 19.18,40.284 19.613,40.716 20.447,40.716 21.082,40.081 21.082,38.43 21.717,37.795 21.717,34.493 22.86,33.35 22.86,26.873 P1.10
PB15: P1.11 U1.36 | length 17.2
  Top Layer w0.203: U1.36 18.827,40.638 19.286,41.097 20.574,41.097 20.574,41.092 21.438,40.228 21.438,38.583 22.098,37.922 22.098,34.62 23.216,33.503 23.216,30.074 24.638,28.651 P1.11
PC0: SX1276.5 U1.8 | length 33.2
  Top Layer w0.203: v1(3.175,52.019) 3.175,61.671 3.556,62.052 SX1276.5 ; U1.8 v1(9.482,34.901)
  Bottom Layer w0.203: v1(3.175,52.019) 3.175,51.892 3.048,51.765 3.137,51.676 3.137,47.993 3.81,47.32 3.81,39.954 8.864,34.901 v1(9.482,34.901)
PC1: P3.10 U1.9 | length 14.5
  Top Layer w0.254: v1(8.38,31.854) 8.38,33.091 U1.9
  Bottom Layer w0.203: P3.10 3.175,26.492 3.175,31.072 3.294,31.191 4.826,31.191 5.489,31.854 v1(8.38,31.854)
PC2: SX1276.1 U1.10 | length 39.3
  Top Layer w0.152: v1(2.54,52.527) 2.54,64.711 4.961,67.132 SX1276.1 ; U1.10 v1(10.189,34.193)
  Bottom Layer w0.152: v1(2.54,52.527) 2.54,51.188 2.807,50.921 2.807,47.725 3.429,47.102 3.429,46.154 3.46,46.123 3.46,45.685 3.429,45.654 3.429,39.7 8.936,34.193 v1(10.189,34.193)
PC3: P3.9 U1.11 | length 17.5
  Top Layer w0.254: v1(9.194,30.941) 9.207,30.954 9.207,32.503 U1.11
  Bottom Layer w0.203: P3.9 3.556,24.333 3.556,30.683 5.08,30.683 5.697,31.3 8.728,31.3 9.087,30.941 v1(9.194,30.941)
PC4: P1.3 U1.24 | length 30.2
  Top Layer w0.203: U1.24 18.446,32.461 19.177,32.461 20.345,31.293 20.345,20.45 20.385,20.41 20.385,19.95 22.225,18.11 22.225,15.57 22.733,15.062 22.733,13.67 23.139,13.264 23.139,9.863 24.544,8.458 24.544,7.409 P1.3
PC5: P1.4 U1.25 | length 27.9
  Top Layer w0.203: U1.25 18.518,33.096 19.304,33.096 20.726,31.674 20.726,20.894 20.741,20.88 20.741,20.235 22.758,18.217 22.758,15.54 23.114,15.184 23.114,13.792 23.495,13.411 23.495,10.998 P1.4
PC6: P1.12 U1.37 | length 15.5
  Top Layer w0.203: U1.37 18.449,40.991 19.063,41.605 20.574,41.605 21.234,40.945 21.234,40.935 21.793,40.376 21.793,38.862 22.479,38.176 22.479,34.747 23.571,33.655 23.571,32.291 24.583,31.28 24.583,30.231 P1.12
PC7: P1.13 U1.38 | length 13.9
  Top Layer w0.203: U1.38 18.816,42.113 20.574,42.113 21.59,41.097 21.59,41.082 22.149,40.523 22.149,39.141 22.86,38.43 22.86,35.317 24.371,33.806 24.371,32.982 P1.13
PC8: P1.14 U1.39 | length 12.3
  Top Layer w0.203: U1.39 18.617,42.621 20.599,42.621 22.504,40.716 22.504,39.802 23.495,38.811 23.495,36.398 P1.14
PC9: P1.15 U1.40 | length 10.8
  Top Layer w0.203: U1.40 18.418,43.129 20.701,43.129 22.86,40.97 22.86,40.623 24.583,38.9 24.583,37.851 P1.15
PC10: P3.16 U1.51 | length 18.7
  Top Layer w0.203: P3.16 0.724,41.389 0.724,46.49 1.135,46.901 2.248,46.901 2.921,47.574 7.459,47.574 9.615,45.418 9.732,45.418 U1.51
PC11: P3.15 U1.52 | length 20.7
  Top Layer w0.203: v1(2.777,46.64) 2.78,46.64 3.206,47.066 7.377,47.066 U1.52
  Bottom Layer w0.203: P3.15 0.368,39.205 0.368,45.784 1.143,46.558 2.07,46.558 2.152,46.64 v1(2.777,46.64)
PC12: P3.14 U1.53 | length 22.5
  Top Layer w0.203: v1(2.931,45.904) 3.038,45.904 3.358,46.224 3.603,46.224 3.937,46.558 7.178,46.558 U1.53
  Bottom Layer w0.203: P3.14 1.833,35.311 1.833,36.36 2.832,37.359 2.832,38.232 2.215,38.849 1.486,38.849 0.724,39.611 0.724,43.312 1.557,44.145 1.999,44.145 2.937,45.083 2.937,45.899 v1(2.931,45.904)
PC13: SX1276.9 U1.2 | length 25.6
  Top Layer w0.152: v1(3.81,53.035) 3.81,56.718 4.064,56.972 SX1276.9 ; U1.2@6.794,36.395 v1@8.079,37.679
  Top Layer w0.203: U1.2 U1.2@6.794,36.395 ; v1@8.079,37.679 v1(8.139,37.679)
  Bottom Layer w0.152: v1(3.81,53.035) 3.81,51.638 3.556,51.384 3.556,48.209 4.191,47.574 4.191,40.081 4.28,39.992 5.656,39.992 6.492,39.156 ; 6.64,39.156 v1@8.117,37.679
  Bottom Layer w0.203: 6.492,39.156 6.64,39.156 ; v1@8.117,37.679 v1(8.139,37.679)
PC14: C11.1 U1.3 X1.1 | length 19.2
  Top Layer w0.152: U1.3 6.096,35.05 6.096,26.238 6.828,25.506 9.854,25.506 10.033,25.328 X1.1 12.267,24.333 12.446,24.155 C11.1@12.446,22.936
PC15: C12.2 U1.4 X1.4 | length 18
  Top Layer w0.152: U1.4 6.731,34.978 6.731,26.492 7.112,26.111 9.854,26.111 10.033,26.29 X1.4 10.058,27.508 12.267,27.508 12.446,27.687 C12.2
PD2: P3.13 U1.54 | length 21.4
  Top Layer w0.203: v1(2.875,44.238) 2.875,44.331 4.594,46.05 6.978,46.05 U1.54
  Bottom Layer w0.203: P3.13 3.362,34.3 3.362,39.274 2.875,39.762 v1(2.875,44.238)
SDO: R6.2 R7.2 U3.5 | length 9.5
  Top Layer w0.203: v1(11.272,52.429) 11.255,52.413 11.255,51.229 11.586,50.898 U3.5
  Bottom Layer w0.203: v1(11.272,52.429) 11.255,52.446 11.255,53.526 11.434,53.705 16.001,53.705 16.232,53.473 16.232,53.173 R7.2@16.444,52.961 ; R7.2 16.437,52.968 R6.2
VBat: J2.1 P1.1 | length 3.6
  Bottom Layer w0.254: J2.1 24.257,2.616 P1.1
VCC: C1.1 C2.1 C3.2 C6.1 C7.1 C8.1 C9.2 J3.2 P2.5 P3.4 R4.2 R5.2 R7.1 SX1276.2 U1.1 U1.13 U1.19 U1.32 U1.48 U1.64 U3.2 U3.6 U3.8 | length 131.5
  Top Layer w0.203: SX1276.2 SX1276.2@5.474,65.875 ; v1(5.656,36.024) U1.1 6.381,36.82 6.695,37.135 U1.64@6.695,39.263 ; U1.64 U1.64@6.695,39.263 ; v1@7.404,65.875 v1(7.417,65.888) 7.442,65.862 9.906,65.862 12.151,63.617 v1(12.151,52.97) 12.157,52.964 12.157,51.709 C6.1 12.199,51.666 12.199,50.86 U3.6 ; v1(9.964,31.877) 9.979,31.877 10.608,32.506 U1.13 ; v1(11.994,42.367) 11.994,42.274 8.149,38.43 7.527,38.43 U1.64@6.695,39.263 ; U3.6@12.162,50.86 12.162,50.583 12.554,50.192 12.836,50.192 ; U3.8 13.488,50.775 13.488,50.461 13.219,50.192 12.836,50.192 ; v1(13.814,44.301) 13.874,44.301 14.453,44.88 U1.48 ; v1(14.351,32.969) 14.377,32.969 15.194,32.152 U1.19 ; U1.48@14.503,44.907 13.478,45.932 C1.1 13.487,46.669 13.487,47.541 12.886,48.142 U3.2 12.886,50.142 12.836,50.192 ; v1(18.923,37.668) 18.923,37.655 19.816,36.762 U1.32
  Top Layer w0.254: SX1276.2@5.474,65.875 v1@7.404,65.875 ; U1.19 19.212,28.16 19.212,20.234 J3.2 18.034,18.618 P2.5
  Bottom Layer w0.203: v1(5.656,36.024) 5.737,36.024 9.884,31.877 v1(9.964,31.877) 9.994,31.907 13.289,31.907 v1(14.351,32.969) 14.427,32.893 14.788,32.893 15.347,32.334 C3.2 18.923,35.382 v1(18.923,37.668) ; v1(7.417,65.888) v1@7.442,65.862 ; R4.2 R5.2 C7.1 13.577,50.199 13.811,50.433 C8.1 C8.1@15.059,50.433 ; v1(11.994,42.367) 11.994,42.444 13.814,44.265 v1(13.814,44.301) ; v1(12.151,52.97) 12.153,52.971 15.481,52.971 R7.1 15.482,50.856 C8.1@15.059,50.433 ; C2.1 C8.1@15.059,50.433
  Bottom Layer w0.254: P3.4 4.077,7.557 15.104,7.557 17.145,5.515 17.145,3.505 P2.5 ; v1@7.442,65.862 C9.2
VSS: B1.2 C1.2 C2.2 C3.1 C4.2 C5.2 C6.2 C7.2 C8.2 C9.1 C10.2 C11.2 C12.1 C13.1 P2.1 P3.1 R3.1 R6.1 R9.2 SX1276.3 SX1276.4 U1.12 U1.18 U1.31 U1.47 U1.63 U2.1 U3.1 U3.7 | length 143.4
  Top Layer w0.152: U1.12 11.006,33.596 v1(11.006,34.196)
  Top Layer w0.203: SX1276.4 SX1276.4@5.961,63.322 ; SX1276.3 SX1276.3@5.961,64.592 ; 6.479,63.84 6.716,63.84 v1(6.782,63.906) ; v1@6.581,63.973 6.716,63.973 v1(6.782,63.906) ; v1(11.557,54.559) 11.557,63.576 11.227,63.906 v1(6.782,63.906) ; U3.7 12.914,50.851 C6.2@12.914,51.675 ; U1.47@14.866,44.599 15.296,45.029 15.296,45.642 14.278,46.66 C1.2 14.258,47.701 ; v1(15.193,47.676) 15.168,47.701 14.258,47.701 ; C6.2@12.914,51.675 C6.2 ; C6.2@12.914,51.675 C6.2 ; C6.2 13.62,51.703 14.092,51.231 14.092,50.342 13.536,49.786 U3.1 13.536,48.698 13.584,48.65 13.659,48.65 14.258,48.051 14.258,47.701
  Top Layer w0.254: SX1276.4@5.961,63.322 6.479,63.84 ; SX1276.3@5.961,64.592 v1@6.581,63.973 ; U1.63 7.392,39.273 7.814,39.273 v1(7.821,39.266) ; P2.1 7.874,5.664 8.509,6.299 B1.2 v1(8.509,9.728) ; v1(13.54,31.108) 13.54,31.201 13.681,31.342 v1(13.681,34.62) 13.716,34.62 15.113,36.017 v1(15.113,36.123) ; v1(13.589,43.256) 14.866,44.533 U1.47@14.866,44.599 ; C12.1 13.932,29.142 17.081,29.142 ; C11.2 18.288,22.936 18.415,22.809 ; U1.18 15.748,30.917 v1(15.748,30.475) 17.081,29.142 ; v1(15.24,38.811) 16.764,38.811 18.486,37.089 18.768,37.089 U1.31 ; v1(18.415,21.539) 18.415,22.809 ; 17.081,29.142 18.415,27.808 18.415,22.809
  Bottom Layer w0.152: U2.1@19.108,13.025 U2.1@19.298,13.025 ; C4.2@21.341,13.025 C4.2
  Bottom Layer w0.203: v1(6.782,63.906) v1@6.875,63.906 ; v1(11.557,54.559) 16.51,54.559 17.399,53.67 17.399,52.096 R6.1 17.966,52.084 18.085,51.965 18.085,49.26 17.858,49.033 C8.2 ; C7.2 14.608,49.399 C8.2 ; v1(15.193,47.676) 15.193,48.814 C8.2
  Bottom Layer w0.254: P3.1 2.857,2.235 3.238,2.616 P2.1 ; v1@6.875,63.906 7.27,63.512 C9.1 ; v1(7.821,39.266) 7.887,39.2 8.044,39.2 8.786,38.458 R3.1 8.841,36.361 v1(11.006,34.196) 11.339,34.529 C13.1 12.426,34.529 12.493,34.596 13.438,34.596 13.462,34.62 v1(13.681,34.62) ; v1(8.509,9.728) C10.2 11.708,10.895 14.354,13.541 C5.2 ; v1(13.54,31.108) 14.188,30.46 15.733,30.46 v1(15.748,30.475) ; v1(13.589,43.256) 15.24,41.605 v1(15.24,38.811) 15.176,38.748 15.176,36.186 v1(15.113,36.123) ; R9.2 15.494,15.316 C5.2 ; v1(18.415,21.539) 18.415,14.427 19.125,13.718 19.125,13.198 19.298,13.025 U2.1 C4.2@21.341,13.025 ; U2.1@19.108,13.025 18.592,13.541 C5.2

## Polygon pours and split planes (outlines as drawn)
VSS on Top Layer "VSS_L01_P000" (solid, pour order 0): 8.255,29.794 17.018,29.794 17.018,22.047 8.255,22.047
VSS on Top Layer "VSS_L01_P003" (solid, pour order 3): 5.461,29.794 8.255,29.794 8.255,22.047 5.461,22.047
VSS on Top Layer "VSS_L01_P002" (solid, pour order 2): 5.461,35.001 7.373,35.001 7.373,26.359 8.783,26.359 8.783,25.248 6.604,25.248 5.461,26.391
VSS on Bottom Layer "VSS_L02_P005" (solid, pour order 5): 0,77.724 26.34,77.724 26.391,77.673 26.391,0.991 0.102,0.991 0,1.092

## Silkscreen, mask and mechanical layers (free items; w line width, h text height)
Top Overlay:
  text "STM32 LoRa Node / Design by Leon Bazdar" at 0.356,76.784 h1.02 r270
  text "20" at 3.391,50.876 h0.76
  text "20" at 21.59,50.876 h0.76
  text "10" at 3.175,24.841 h0.76
  text "10" at 22.225,24.841 h0.76
  text "FER UniZG / V1.0-2021." at 10.16,7.62 h0.76
  text "1" at 3.175,1.981 h0.76
  text "1" at 22.86,1.981 h0.76

## Text inside footprints (layer, text, board x,y; h text height)
P2: Top Overlay "5" at 17.654,4.316 h1.02; Top Overlay "1" at 7.754,4.316 h1.02
U1: Mechanical 7 "0.394in/10.008mm" at 3.402,28.017 h0.64 r45; Mechanical 7 "0.394in/10.008mm" at 18.08,29.589 h0.64 r45; Mechanical 7 "0.453in/11.5mm" at 17.9,30.217 h0.64 r45; Mechanical 7 "0.453in/11.5mm" at 18.978,43.594 h0.64 r45; Mechanical 7 "0.02in/0.5mm" at 2.498,32.064 h0.64 r45; Mechanical 7 "Alt 2 Padstyle: OX90Y60D30P" at 20.505,18.633 h1.27 r45; Mechanical 7 "Alt 1 Padstyle: OX60Y90D30P" at 19.427,19.71 h1.27 r45; Mechanical 7 "Default Padstyle: RX47Y12D0T" at 15.97,22.719 h1.27 r45